# Altium PCB PCB_LED_Driver_Battery-PWR.PcbDoc
Units mil, origin at the board's own origin, x right, y up, seen from the top; angles counter-clockwise.
Board outline 3000 x 2000 mil, 2 copper layers (Top Layer, Bottom Layer), stack 63 mil thick; 9 components, 7 nets, 33 pads, 2 vias.
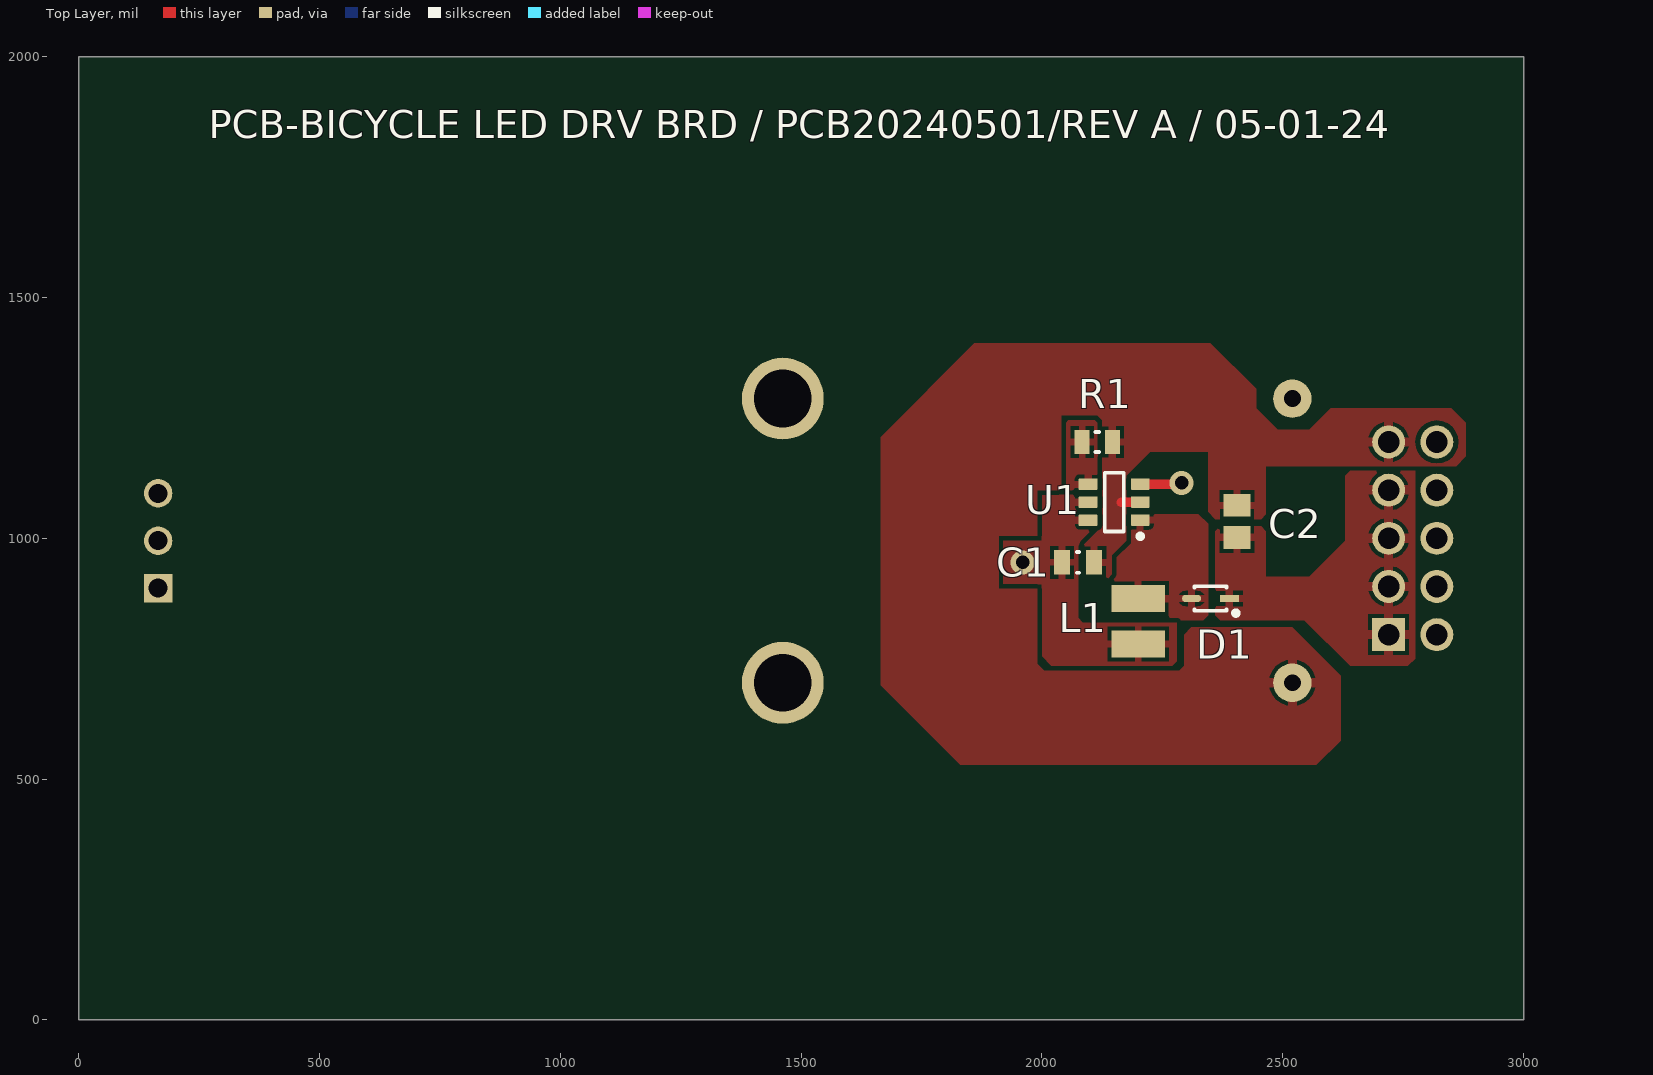
[diagram p0: Top Layer view]
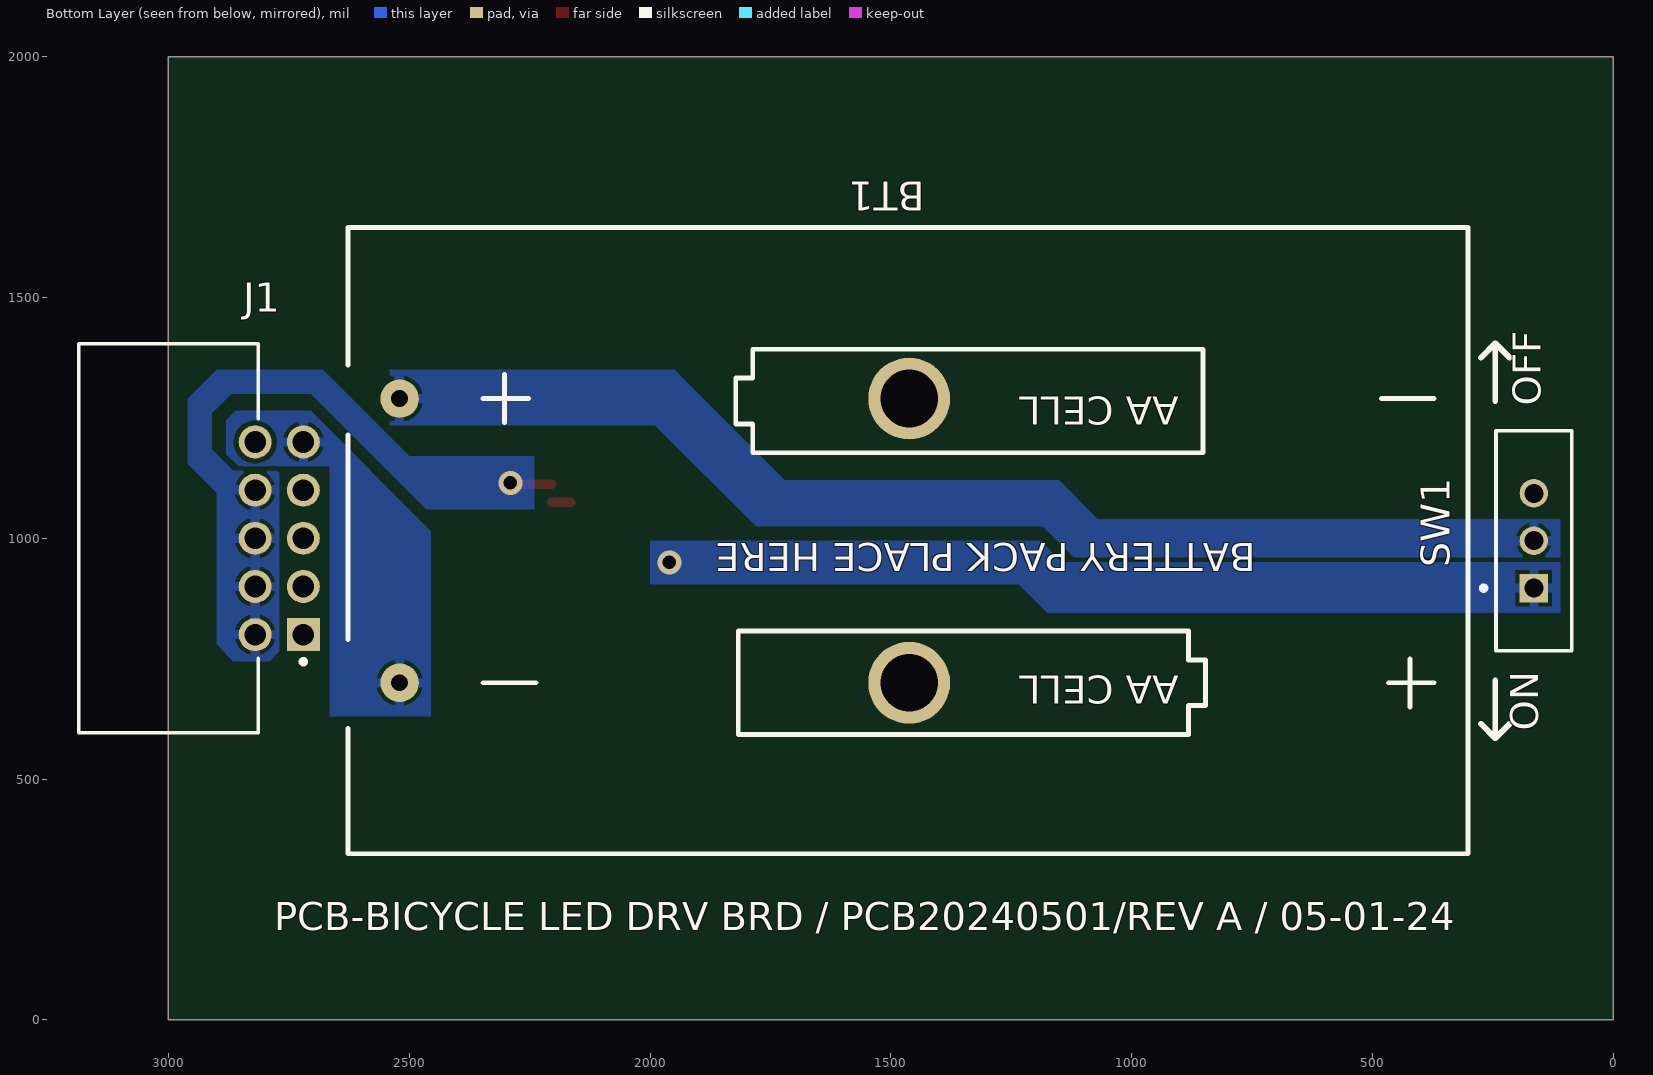
[diagram p1: Bottom Layer view, seen from below]

## Layer stack, top to bottom
Top Solder: solder mask 0.8, Solder Resist, Dk 3.5
Top Layer: signal copper 2
Dielectric 1: dielectric 59, FR-4, Dk 4.8
Bottom Layer: signal copper 2
Bottom Solder: solder mask 0.8, Solder Resist, Dk 3.5

## Board outline
0,0 0,2000 3000,2000 3000,0

## Design rules (kind name [scope] priority, off if disabled: settings)
Clearance [All] p1: gap=10 ignorepadtopadclearanceinfootprint=FALSE ismatrix=TRUE
ComponentClearance [All] p1: gap=5 collisioncheckmode=3 verticalgap=10 showdistances=FALSE
HoleSize [All] p1: absolutevalues=TRUE maxlimit=150 minlimit=1 maxpercent=80.000 minpercent=20.000
HoleToHoleClearance [All] p1: gap=5 allowstackedmicrovias=TRUE
MinimumSolderMaskSliver [All] p1: minsoldermaskwidth=4
PlaneClearance [All] p1: clearance=5
PlaneConnect [All] p1: pad.planeconnectstyle=Direct pad.reliefexpansion=20 pad.reliefentries=4 pad.reliefconductorwidth=15 pad.reliefairgap=5 via.planeconnectstyle=Relief via.reliefexpansion=20 via.reliefentries=4 via.reliefconductorwidth=20 via.reliefairgap=5
PolygonConnect PolygonConnectStyle_1 [All] p1: thpad.connectstyle=Relief thpad.reliefconductorwidth=20 thpad.reliefentries=4 thpad.polygonreliefangle="90 Angle" thpad.airgapwidth=8 smdpad.connectstyle=Relief smdpad.reliefconductorwidth=15 smdpad.reliefentries=4 smdpad.polygonreliefangle="90 Angle" smdpad.airgapwidth=8 via.connectstyle=Direct via.reliefconductorwidth=10 via.reliefentries=2 via.polygonreliefangle="0 Angle" via.airgapwidth=10
PolygonConnect [All] p2: connectstyle=Relief reliefconductorwidth=10 reliefentries=4 polygonreliefangle="90 Angle" airgapwidth=10
RoutingCorners [All] p1: cornerstyle=45-Degree minsetback=50 maxsetback=100
RoutingVias RoutingViaStyle_1 [All] p1: holewidth=10 width=10 viastyle="Through Hole" minholewidth=8 minwidth=30 maxholewidth=28 maxwidth=50
RoutingVias [All] p2: holewidth=28 width=50 viastyle="Through Hole" minholewidth=28 minwidth=50 maxholewidth=28 maxwidth=50
SilkToSilkClearance [All] p1: silktosilkclearance=4
SilkToSolderMaskClearance [IsPad] p1: minsilkscreentomaskgap=4 clearancetoexposedcopper=TRUE
SolderMaskExpansion [All] p1: expansion=4 istentingtop=FALSE
SupplyNets "Schematic Supply Nets" [InNet('GND')] p1: voltage=0.000
Width MaxMinWidth_9 [All] p1: maxlimit=20 minlimit=2 preferedwidth=10 minimp=50.000000 maximp=50.000000 favimp=50.000000
Width MaxMinWidth_1 [InNet('GND')] p2: maxlimit=5 minlimit=5 preferedwidth=10 minimp=50.000000 maximp=50.000000 favimp=50.000000
Width MaxMinWidth_2 [InNet('LED_ANODES')] p3: maxlimit=5 minlimit=5 preferedwidth=10 minimp=50.000000 maximp=50.000000 favimp=50.000000
Width MaxMinWidth_3 [InNet('LED_CATHODES')] p4: maxlimit=5 minlimit=5 preferedwidth=10 minimp=50.000000 maximp=50.000000 favimp=50.000000
Width MaxMinWidth_4 [InNet('NetBT1_1')] p5: maxlimit=5 minlimit=5 preferedwidth=10 minimp=50.000000 maximp=50.000000 favimp=50.000000
Width MaxMinWidth_5 [InNet('NetC1_2')] p6: maxlimit=5 minlimit=5 preferedwidth=10 minimp=50.000000 maximp=50.000000 favimp=50.000000
Width MaxMinWidth_6 [InNet('NetD1_2')] p7: maxlimit=5 minlimit=5 preferedwidth=10 minimp=50.000000 maximp=50.000000 favimp=50.000000
Width MaxMinWidth_7 [InNet('NetR1_1')] p8: maxlimit=5 minlimit=5 preferedwidth=10 minimp=50.000000 maximp=50.000000 favimp=50.000000
Width [All] p9: maxlimit=10 minlimit=10 preferedwidth=10
21 further rules are at their usual default settings.

## Components (designator, comment, footprint, x,y, rotation, side; value= is the part's Value field where it differs from the comment)
BT1 "2462" 2462-Footprint-1 2520,700 r0 bottom
C1 "JMK212BJ475KD-T" 0805_L 2075,950 r180 top value=4.7µF
C2 "Capacitor 1 uF +/- 10% 50 V 0805" CAPC2013X135X45NL10T25 2405,1035 r90 top value=1µF
D1 "ZHCS400TA" FP-SOD323-IPC_C 2350,875 r180 top
J1 "70247-1051" FP-70247-1051-MFG 3000,1000 r270 bottom
L1 "744032004" WE-LQ_1210 -47800,50827.76 r90 top
R1 "RC0805FR-071K5L" RESC2013X60X35LL10T20 2115,1200 r0 top value=1.5k
SW1 "EG1218" ESWI-EG1218_V 165,995 r90 bottom
U1 "LT1932ES6#TRPBF" DDC0006A_N 2150,1075 r180 top

## Footprints (in the part's own frame and the unit in brackets; to place one, negate y for a bottom-side part, rotate by r counter-clockwise, add the part's x,y. Pads: shape width x height; smd on the part's side, far side on the other; paste and mask are expansions set on the pad)
0805_L [mm]
  rect 0.85x1.3 smd: 1(-0.85,0) 2(0.85,0)
  silkscreen extent -0.05,-0.55 0.05,0.55, body extent -1.1,-0.67 1.1,0.68, height 0.7
2462-Footprint-1 [mil]
  round 80 hole 35: 1(0,-590) 2(0,0)
  round 170 hole 120: 3(-1058,0) 4(-1058,-590)
  silkscreen extent -2218,-945 107,355, body extent -2220,-941 107,351, height 611
CAPC2013X135X45NL10T25 [mm] "Chip Capacitor, 2-Leads, Body 2.10x1.35mm, IPC Medium Density"
  rect 1.2x1.4 smd: 1(-0.85,0) 2(0.85,0)
  body extent -1.05,-0.67 1.05,0.67, height 1.35
DDC0006A_N [mm] "SOT23, 6-Leads, Body 3.05x1.75mm, Pitch 0.95mm, IPC Medium Density"
  rrect17% 1x0.6 smd: 1(-1.375,0.95) 2(-1.375,0) 3(-1.375,-0.95) 4(1.375,-0.95) 5(1.375,0) 6(1.375,0.95)
  silkscreen extent -1.5,-1.55 0.5,1.92, body extent -1.43,-1.48 1.43,1.49, height 0.9
ESWI-EG1218_V [mm] "THD, 3-Leads, Body 11.6x4mm, Pitch 2.5mm"
  rect 1.5x1.5 hole 1: 1(-2.5,0)
  round 1.5 hole 1: 2(0,0) 3(2.5,0)
  silkscreen extent -5.8,-2 5.8,2.78, body extent -5.8,-2 5.8,2, height 7.4
FP-70247-1051-MFG [mm]
  rect 1.74x1.74 hole 1.14 paste-2539.97 mask+0: 1(5.08,7.115)
  round 1.74 hole 1.14 paste-2539.97 mask+0: 2(5.08,4.575) 3(2.54,7.115) 4(2.54,4.575) 5(0,7.115) 6(0,4.575) 7(-2.54,7.115) 8(-2.54,4.575) 9(-5.08,7.115) 10(-5.08,4.575)
  silkscreen extent -10.26,-4.73 10.26,7.24, body extent -10.16,-4.64 10.16,7.43, height 9.09
FP-SOD323-IPC_C [mil]
  rect 39.59x15.45 smd paste+0 mask+0: 1(-39.38,0)
  rrect100% 39.59x15.45 smd paste+0 mask+0: 2(39.38,0)
  silkscreen extent -57,-26 33,35, body extent -63,-30 63,30, height 10
RESC2013X60X35LL10T20 [mm]
  rect 0.8x1.25 smd: 1(-0.8,0) 2(0.8,0)
  silkscreen extent -0.1,-0.53 0.1,0.53, body extent -1.05,-0.67 1.05,0.67, height 0.6
WE-LQ_1210 [mm] "SMT Inductor, body 3.2x2.5mm"
  rect 1.4x2.8 smd: 1(-1271.2,-1270) 2(-1268.8,-1270)
  body extent -1271.6,-1271.25 -1268.4,-1268.75, height 1.99

## Part data
BT1: library part CMP-00029-00002-3, "Batteries/Accessories", RoHS Compliant=Yes
C1: library part CMP-001-00093-1, "Ceramic Capacitor, Multilayer, Ceramic, 6.3V, 10% +Tol, 10% -Tol, X5R, 15% TC, 4.7uF, Surface Mount, 0805", Capacitor Type=Ceramic, Case/Package=0805, Max Operating Temperature=85°C, Min Operating Temperature=-55°C, Rated DC Voltage (URdc)=6.3V, Temperature Characteristics Code=X5R, Height=0.85mm, Length=2mm, Mounting Technology="Surface Mount", Pins=2, RoHS Compliant=Yes
C2: library part CMP-001-00007-5, "Chip Capacitor, 1 uF, +/- 10%, 50 V, 0805 (2012 Metric)", Capacitor Type=Ceramic, Case/Package=0805, Max Operating Temperature=125°C, Min Operating Temperature=-55°C, Tolerance=10%, Voltage Rating=50V, Mounting Technology=SM, Pins=2, RoHS Compliant=True
D1: library part CMP-004-00081-1, "Rectifier Diode, Schottky, 1 Phase, 1 Element, 0.4A, 40V V(RRM), Silicon", Forward Voltage=300mV, Max Operating Temperature=150°C, Max Output current=400mA, Max Power Dissipation=250mW, Non-rep Pk Forward Current-Max=3A, Peak Reflow Temperature (Cel)=260°C, Rep Pk Reverse Voltage-Max=40V, Diode Type=RECTIFIER, Pins=2, Reverse Recovery Time-Max=0.01us, RoHS Compliant=Yes, Surface Mount=Yes, Technology=SCHOTTKY
J1: library part CMP-002-00255-1, "Board Connector, 10 Contact(s), 2 Row(s), Male, Right Angle, 0.1 inch Pitch, Solder Terminal, Locking, Black Insulator, Receptacle", Flammability Rating="UL94 V-0", Max Operating Temperature=120°C, Min Operating Temperature=-55°C, Additional Feature=SHROUDED, Body Breadth=0.35inch, Body Depth=0.464inch, Body Length=0.8inch, Body/Shell Style=RECEPTACLE, Connector Type="BOARD CONNECTOR", Contact Finish - Mating=TIN, Contact Gender=Male, Contact Pattern=RECTANGULAR, Mounting Style="RIGHT ANGLE", Mounting Technology=Board, Number of Contacts=10, Number Of PCB Rows=2, PartId=1, RoHS Compliant=Yes, System=Connector, Terminal Pitch=2.54mm
L1: library part CMP-006-00029-1, "General Purpose Inductor, 4.7uH, 20%, 1 Element, Ferrite-Core, SMD, 1210", Case/Size Code=1210, DC Resistance (DCR)=280mR, Inductance-Nom (L)=4.7uH, Inductor Type="GENERAL PURPOSE INDUCTOR", Max Current Rating=490mA, Max Operating Temperature=125°C, Min Operating Temperature=-40°C, Package Height=2mm, Package Length=3.2mm, Package Width=2.5mm, Self Resonant Frequency=31MHz, Test Frequency=1MHz, Tolerance=20%, Core Material=Ferrite, Pins=2, Quality Factor-Min (at L-nom)=20, Reach SVHC Compliant=Yes, RoHS Compliant=Yes, Shape/Size Description="RECTANGULAR PACKAGE", Shielding=Unshielded, Surface Mount=Yes
R1: library part CMP-009-00196-1, "Fixed Resistor, Metal Glaze/thick Film, 0.125W, 1500ohm, 150V, 1% +/-Tol, 100ppm/Cel, Surface Mount, 0805", Case/Package=0805, Max Operating Temperature=155°C, Min Operating Temperature=-55°C, Package Height=0.5mm, Package Length=2mm, Package Width=1.25mm, Power=125mW, Resistor Type="FIXED RESISTOR", Tolerance=1%, Working Voltage=150V, Construction=Chip, Mounting Technology="Surface Mount", Pins=2, Reach SVHC Compliant=Yes, RoHS Compliant=Yes
SW1: library part CMP-011-00006-1, "Slide Switch, SPDT, 500 V, -20 to 70 degC, 3-Pin THD, RoHS, Bulk", Contact Current Rating=200mA, Manufacturer=E-Switch, Max Operating Temperature=70°C, Min Operating Temperature=-20°C, Operating Force=250gf, Package Description="3-Pin Through Hole Device, Body 11.6 x 4 mm, Pitch 2.5 mm", Package Quantity=1000, Voltage Rating (AC)=30V, Case/Package=EG1218, Contact Finish=Silver, Contact Material=Copper, Contact Plating=Silver, Current Rating=200mA, Datasheet URL=https://www.e-switch.com/system/asset/product_line/data_sheet/119/EG.pdf, Datasheet Version=Oct-15, Manufacturer URL=http://www.e-switch.ch/en/, Mounting Technology=TH, Package Reference=EG1218, Packaging=Bulk, Pins=3, RoHS Compliant=True, Throw Configuration=SPDT, Voltage Rating (DC)=30V
U1: library part CMP-00024-00006-1, "Switching Regulator, Current-mode, 0.78A, 1600kHz Switching Freq-Max, PDSO6", Case/Package=LSSOP, Max Operating Temperature=70°C, Min Operating Temperature=0°C, Nominal Supply Current=30mA, Nominal Supply Voltage=1.2V, Voltage Rating=4.5V, Mounting Technology=SMD, Pins=6, RoHS Compliant=Yes

## Via types
v1: diameter 50, hole 28, Top Layer to Bottom Layer, 2 vias

## Nets (pads, with @x,y where several pads share a name; then routed paths per layer and width w, separated by ;. In a path a pad name is that pad's centre, name@x,y a point inside that pad or via, vN(x,y) a via of type N, cw(c..) or ccw(c..) an arc to the next point about the centre after c; other vN are vias at no path point)
GND: BT1.2 C1.1 C2.2 J1.9 R1.2 U1.2 | length 39.1
  Top Layer w20: 2165,1075 U1.2
LED_ANODES: C2.1 D1.1 J1.1 J1.3 J1.5 J1.7
LED_CATHODES: J1.2 J1.4 J1.6 J1.8 U1.3 | length 86.9
  Top Layer w15: v1@2287.4,1112.4 v1(2290,1115)
  Top Layer w20: U1.3 v1@2287.4,1112.4
NetBT1_1: BT1.1 SW1.2
NetC1_2: C1.2 L1.1 SW1.1 U1.5 U1.6
  other v1: 1960,950
NetD1_2: D1.2 L1.2 U1.1
NetR1_1: R1.1 U1.4
pads on no net: BT1.3 BT1.4 J1.10 SW1.3

## Polygon pours and split planes (outlines as drawn)
GND on Top Layer "GND_L01_P000" (solid, pour order 0): 1910,895 1990,895 1990,740 2005,725 2285,725 2295,735 2295,800 2310,815 2520,815 2620,715 2620,580 2570,530 1830,530 1665,695 1665,1210 1860,1405 2350,1405 2445,1310 2445,1270 2490,1225 2555,1225 2600,1270 2850,1270 2880,1240 2880,1170 2860,1150 2465,1150 2465,1050 2455,1040 2360,1040 2345,1055 2345,1180 2225,1180 2175,1130 2175,995 2145,965 2145,925 2135,915 2085,915 2080,920 2080,980 2125,1025 2125,1245 2115,1255 2040,1255 2040,1105 2035,1100 1990,1100 1990,1005 1910,1005
LED_ANODES on Top Layer "LED_ANODES_L01_P004" (solid, pour order 4): 2465,920 2465,1015 2455,1025 2370,1025 2360,1015 2360,840 2370,830 2545,830 2640,735 2760,735 2775,750 2775,1140 2640,1140 2630,1130 2630,995 2555,920
NetR1_1 on Top Layer "NETR1_1_L01_P003" (solid, pour order 3): 2120,1095 2120,1170 2115,1175 2115,1240 2110,1245 2055,1245 2050,1240 2050,1100 2055,1095
NetD1_2 on Top Layer "NETD1_2_L01_P002" (solid, pour order 2): 2130,830 2335,830 2345,840 2345,1030 2325,1050 2230,1050 2225,1055 2185,1055 2185,990 2155,960 2155,925 2120,890 2120,840
NetC1_2 on Top Layer "NETC1_2_L01_P001" (solid, pour order 1): 2000,995 1920,995 1920,905 2000,905 2000,755 2020,735 2270,735 2280,745 2280,825 2085,825 2075,835 2075,985 2120,1030 2120,1090 2000,1090
NetBT1_1 on Bottom Layer "NETBT1_1_L02_P008" (solid, pour order 8): 110,960 1120,960 1185,1025 1780,1025 1990,1235 2540,1235 2540,1350 1950,1350 1720,1120 1150,1120 1070,1040 110,1040
GND on Bottom Layer "GND_L02_P006" (solid, pour order 6): 2665,630 2665,1150 2855,1150 2880,1175 2880,1245 2860,1265 2705,1265 2455,1015 2455,630
NetC1_2 on Bottom Layer "NETC1_2_L02_P007" (solid, pour order 7): 110,950 110,845 1175,845 1235,905 2000,905 2000,995 1190,995 1145,950
LED_CATHODES on Bottom Layer "LED_CATHODES_L02_P005" (solid, pour order 5): 2240,1060 2465,1060 2705,1300 2870,1300 2910,1260 2910,1185 2865,1140 2775,1140 2770,1135 2770,765 2790,745 2865,745 2900,780 2900,1095 2960,1155 2960,1290 2900,1350 2680,1350 2500,1170 2240,1170

## Silkscreen, mask and mechanical layers (free items; w line width, h text height)
Top Overlay:
  text "PCB-BICYCLE LED DRV BRD / PCB20240501/REV A / 05-01-24" at 270,1811.08 h100
Bottom Overlay:
  lines w12: 215,615 245,585 ; 215,1375 245,1405 ; 245,705 245,585 ; 245,1285 245,1405 ; 275,615 245,585 ; 275,1375 245,1405
  text "OFF" at 131.08,1275 h100 r270
  text "ON" at 136.08,600 h100 r270
  text "PCB-BICYCLE LED DRV BRD / PCB20240501/REV A / 05-01-24" at 2780,166.08 h100
Mechanical 15:
  the board outline again, w10

## Text inside footprints (layer, text, board x,y; h text height)
BT1: Bottom Overlay "AA CELL" at 901.92,733.92 h100 r180; Bottom Overlay "AA CELL" at 901.92,1313.92 h100 r180; Bottom Overlay "BATTERY PACK PLACE HERE" at 742,1008.92 h100 r180